# Altium PCB S905D_MIC_V1.1.PcbDoc
Units mil, origin at the board's own origin, x right, y up, seen from the top; angles counter-clockwise.
Board outline 2558.83 x 2558.83 mil, 2 copper layers (Top Layer, Bottom Layer); 83 components, 66 nets, 488 pads, 507 vias.
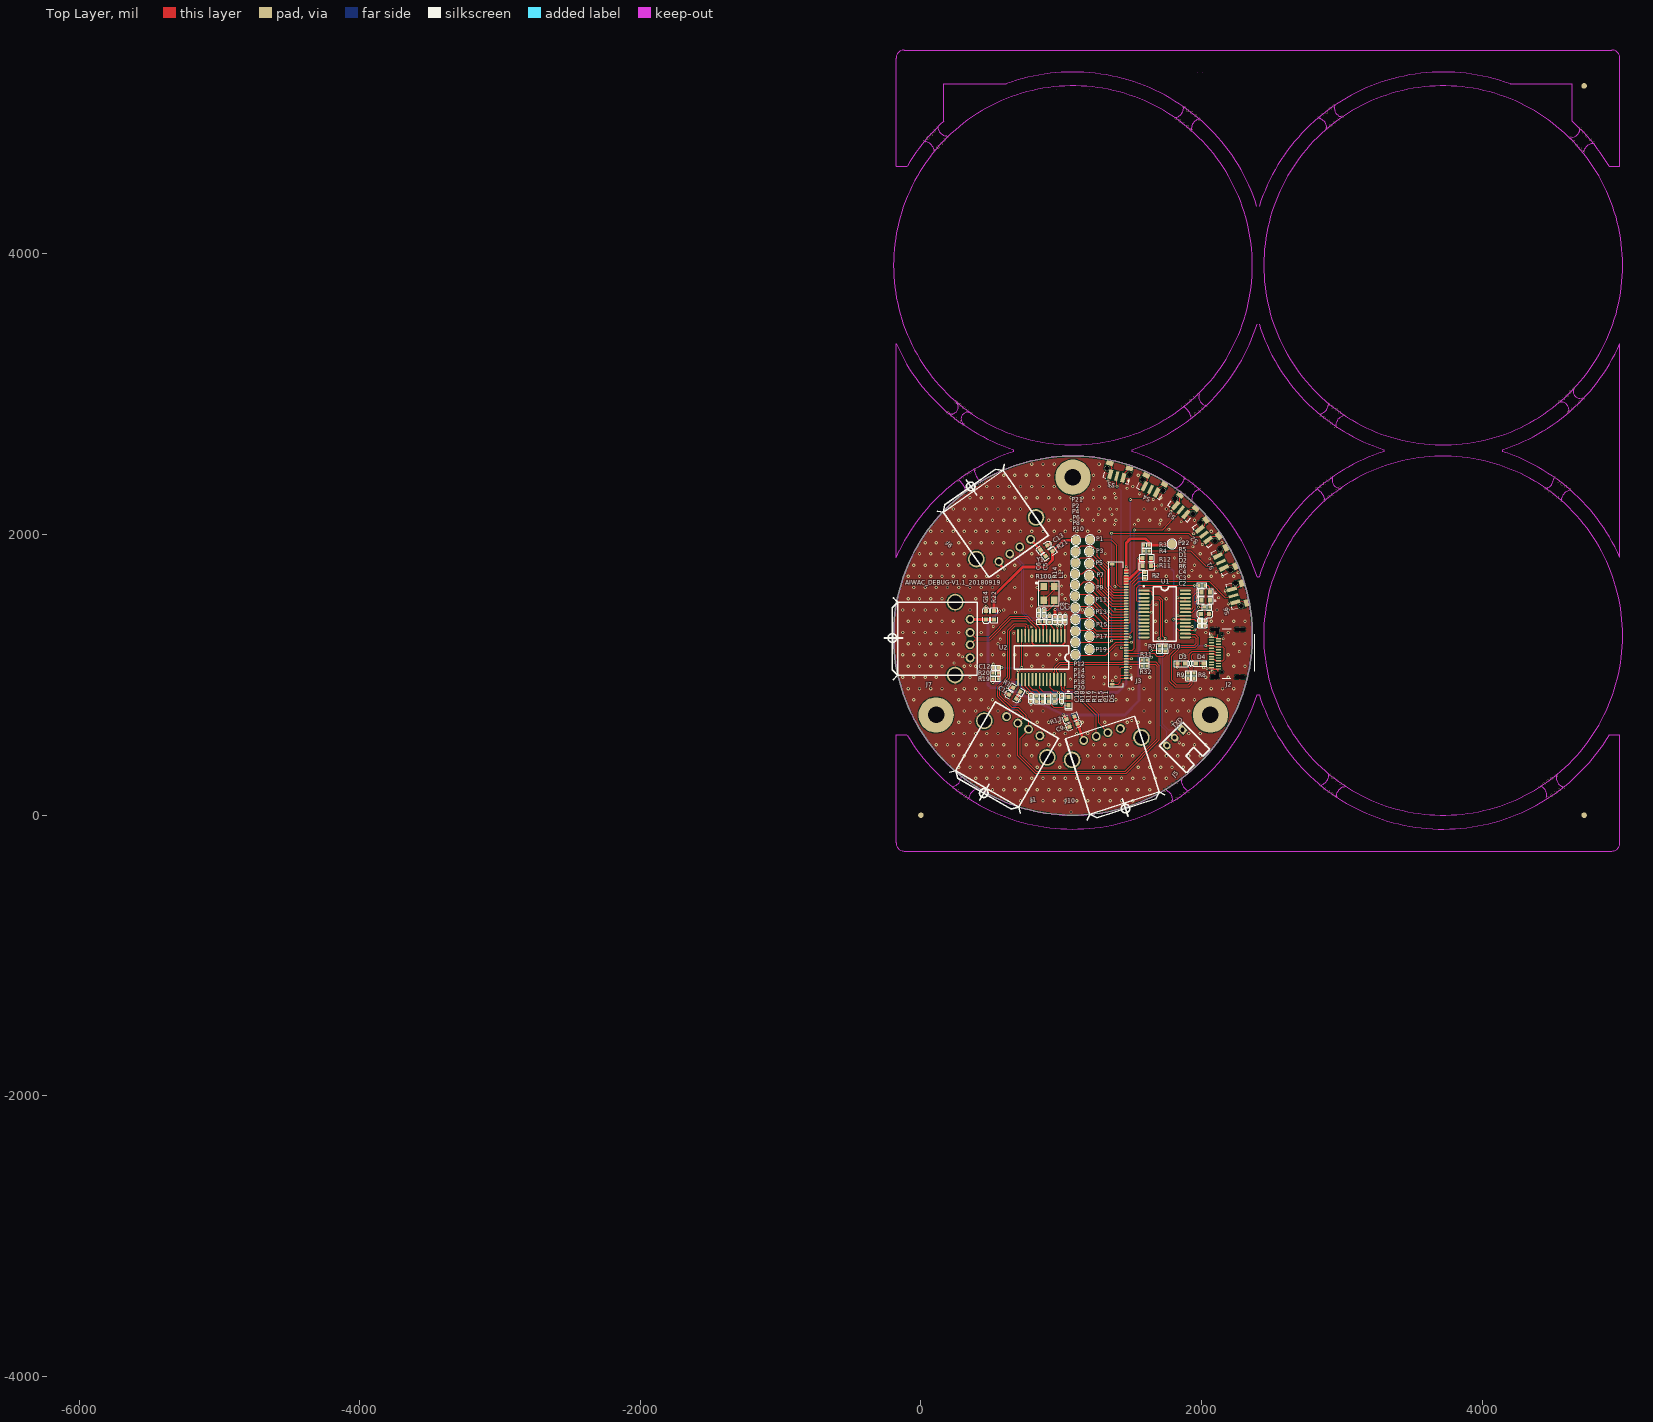
[diagram p0: Top Layer view]
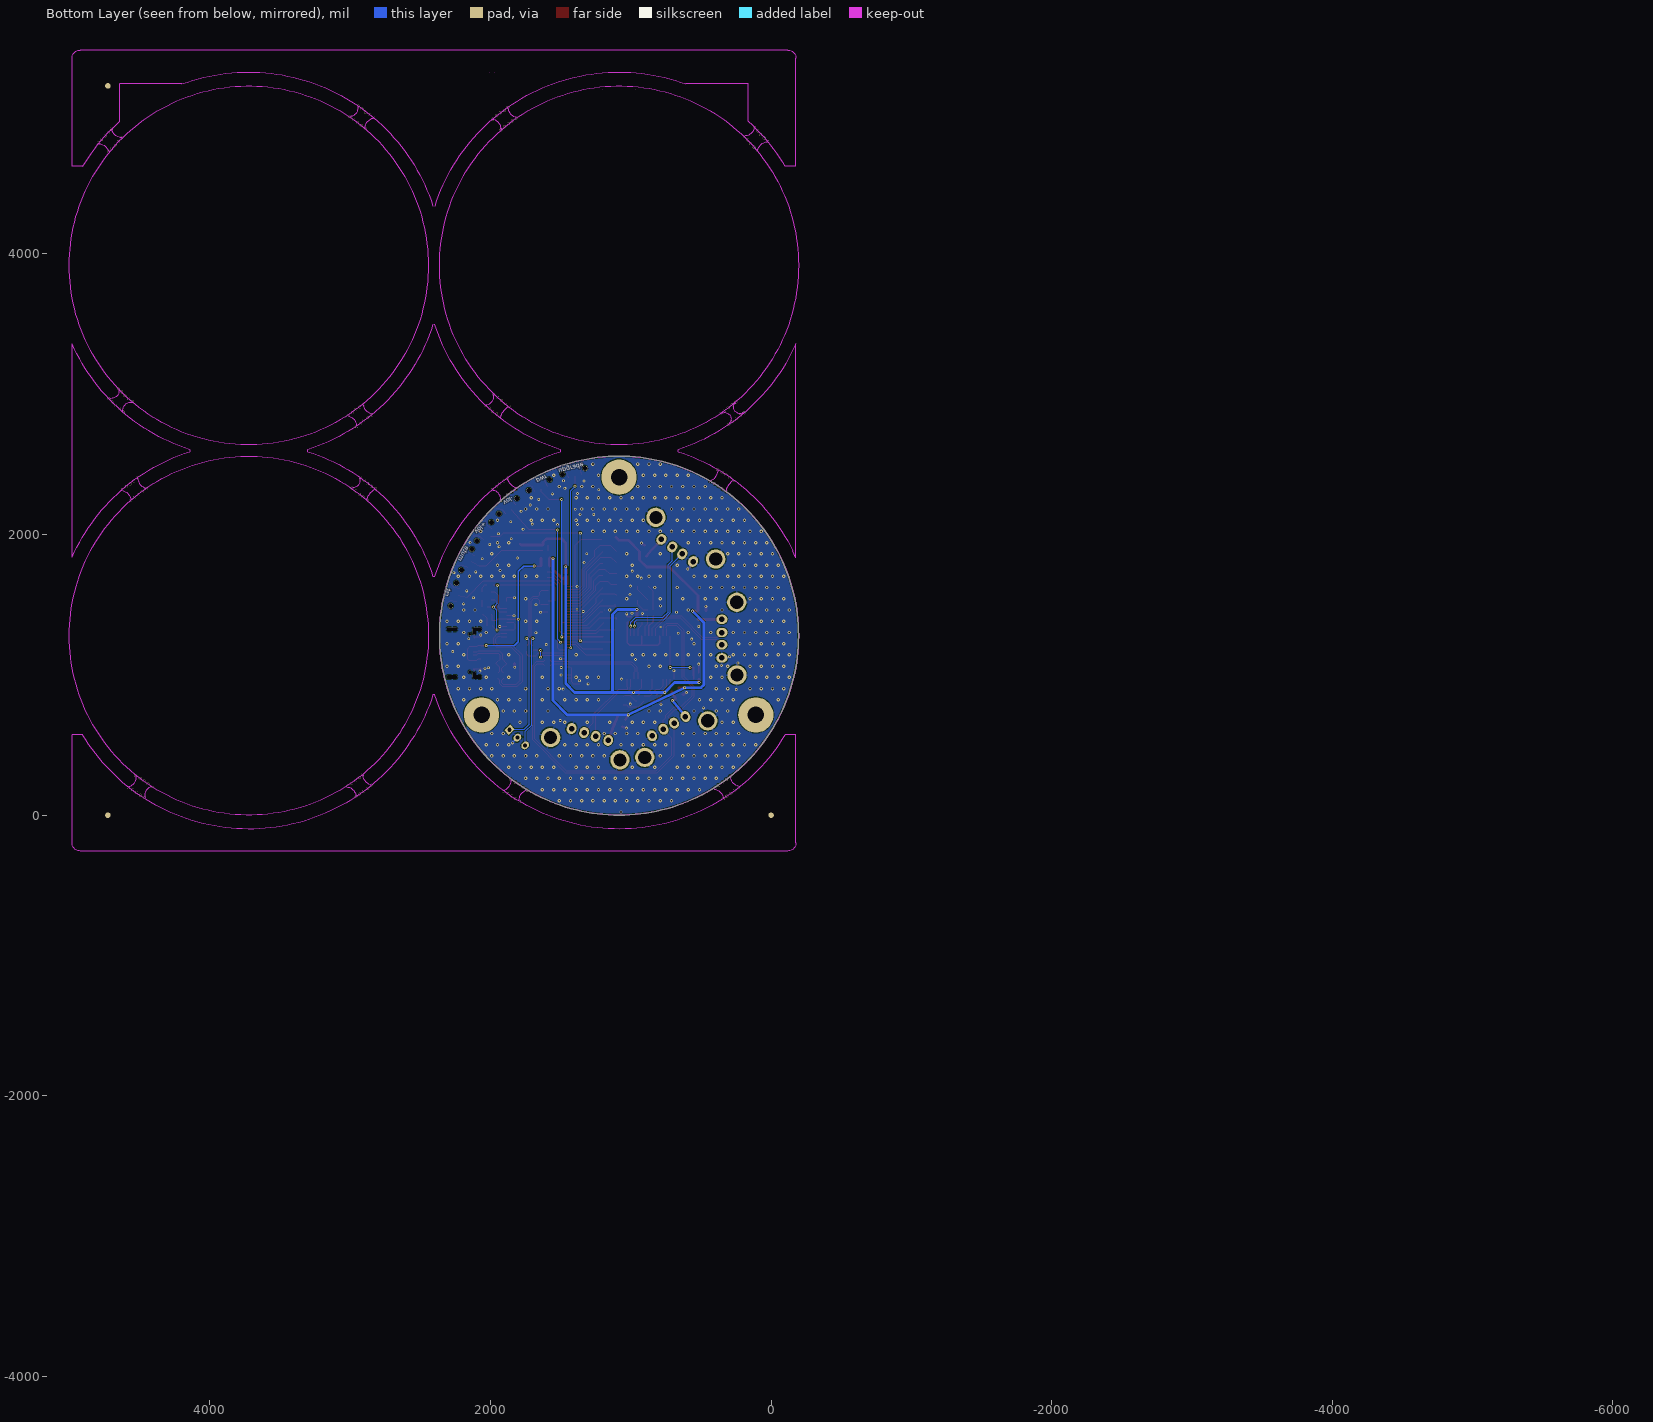
[diagram p1: Bottom Layer view, seen from below]

## Layer stack, top to bottom
Top Solder: solder mask 0.4, Solder Resist, Dk 3.5
Top Layer: signal copper 1.4
Dielectric 1: dielectric 12.6, FR-4, Dk 4.8
Bottom Layer: signal copper 1.4
Bottom Solder: solder mask 0.4, Solder Resist, Dk 3.5

## Board outline
-196.26,1279.66 ccw(c1083.16,1279.66) 1083.16,0.25 ccw(c1083.16,1279.66) 2362.57,1279.66 ccw(c1083.16,1279.66) 1083.16,2559.08 ccw(c1083.16,1279.66)

## Design rules (kind name [scope] priority, off if disabled: settings)
Clearance Clearance_1 [All] p1: gap=7
Clearance [All] p2: gap=7
DiffPairsRouting DiffPair_DiffPairsRouting_2 [InDifferentialPair ('NewDifferentialPair2')] p1: maxlimit=8 minlimit=8 mostfreqgap=8 toplayer_minwidth=8 toplayer_maxwidth=8 toplayer_prefwidth=8 bottomlayer_minwidth=8 bottomlayer_maxwidth=8 bottomlayer_prefwidth=8 maxuncoupledlength=500
DiffPairsRouting DiffPairsRouting_1 [All] p2: maxlimit=8 minlimit=8 mostfreqgap=8 toplayer_minwidth=8 toplayer_maxwidth=8 toplayer_prefwidth=8 bottomlayer_minwidth=8 bottomlayer_maxwidth=8 bottomlayer_prefwidth=8 maxuncoupledlength=500
DiffPairsRouting DiffPair_DiffPairsRouting_1 [InDifferentialPair ('NewDifferentialPair3')] p3: maxlimit=8 minlimit=8 mostfreqgap=8 toplayer_minwidth=8 toplayer_maxwidth=8 toplayer_prefwidth=8 bottomlayer_minwidth=8 bottomlayer_maxwidth=8 bottomlayer_prefwidth=8 maxuncoupledlength=500
DiffPairsRouting DiffPair_DiffPairsRouting [InDifferentialPair ('NewDifferentialPair4')] p4: maxlimit=8 minlimit=8 mostfreqgap=8 toplayer_minwidth=8 toplayer_maxwidth=8 toplayer_prefwidth=8 bottomlayer_minwidth=8 bottomlayer_maxwidth=8 bottomlayer_prefwidth=8 maxuncoupledlength=500
DiffPairsRouting [All] p5: maxlimit=10 minlimit=8 mostfreqgap=8 toplayer_minwidth=8 toplayer_maxwidth=8 toplayer_prefwidth=8 bottomlayer_minwidth=8 bottomlayer_maxwidth=8 bottomlayer_prefwidth=8 maxuncoupledlength=500
DiffPairsRouting DiffPair_DiffPairsRouting_3 [InDifferentialPair ('NewDifferentialPair1')] p6: maxlimit=8 minlimit=8 mostfreqgap=8 toplayer_minwidth=8 toplayer_maxwidth=8 toplayer_prefwidth=8 bottomlayer_minwidth=8 bottomlayer_maxwidth=8 bottomlayer_prefwidth=8 maxuncoupledlength=500
MatchedLengths DiffPair_MatchedLengths [InDifferentialPair ('NewDifferentialPair4')] p1: tolerance=1000 checknetsindiffpair=FALSE checkdiffpairvsdiffpair=TRUE checkxsignals=TRUE checkothers=TRUE
MatchedLengths DiffPair_MatchedLengths_1 [InDifferentialPair ('NewDifferentialPair3')] p2: tolerance=1000 checknetsindiffpair=FALSE checkdiffpairvsdiffpair=TRUE checkxsignals=TRUE checkothers=TRUE
MatchedLengths DiffPair_MatchedLengths_2 [InDifferentialPair ('NewDifferentialPair2')] p3: tolerance=1000 checknetsindiffpair=FALSE checkdiffpairvsdiffpair=TRUE checkxsignals=TRUE checkothers=TRUE
MatchedLengths DiffPair_MatchedLengths_3 [InDifferentialPair ('NewDifferentialPair1')] p4: tolerance=1000 checknetsindiffpair=FALSE checkdiffpairvsdiffpair=TRUE checkxsignals=TRUE checkothers=TRUE
PolygonConnect PolygonConnect_2 [isvia] p1: connectstyle=Direct reliefconductorwidth=10 reliefentries=4 polygonreliefangle="90 Angle" airgapwidth=10
PolygonConnect [All] p2: connectstyle=Relief reliefconductorwidth=10 reliefentries=4 polygonreliefangle="90 Angle" airgapwidth=10
RoutingVias [All] p1: holewidth=10 width=20 viastyle="Through Hole" minholewidth=10 minwidth=20 maxholewidth=10 maxwidth=20
SilkToSilkClearance [All] p1: silktosilkclearance=0
SilkToSolderMaskClearance [IsPad] p1: minsilkscreentomaskgap=0 clearancetoexposedcopper=TRUE
SolderMaskExpansion [All] p1: expansion=4
Width [All] p1: maxlimit=20 minlimit=8 preferedwidth=10 minimp=50.000000 maximp=50.000000 favimp=50.000000
27 further rules are at their usual default settings.

## Components (designator, comment, footprint, x,y, rotation, side; value= is the part's Value field where it differs from the comment)
C1 "106K50V" C0603 679,830 r150 top
C2 "101J10V" C0402 2004.48,1350 r0 top
C3 "101J10V" C0402 2004.48,1386 r0 top
C4 "106K50V" C0603 1993.5,1434 r0 top locked
C5 "22PF" C0402 878,1441 r270 top
C6 "22PF" C0402 840,1441 r270 top
C7 "0.1UF" C0402 1028,1394 r90 top
C8 "0.1UF" C0402 992,1395 r90 top
C9 "106K50V" C0603 1115.38,651.52 r200 top
C10 "0.1UF" C0402 784,832 r90 top
C11 "0.1UF" C0402 1004,832 r90 top
C12 "0.1UF" C0402 534,1053 r180 top
C13 "106K50V" C0603 852,1890 r35 top
C14 "106K50V" C0603 464,1394.5 r90 top
D1 "LED0603G" D-LED0603G 2059,1589 r180 top locked
D2 "LED0603G" D-LED0603G 2059,1532 r180 top locked
D3 "ESDA_TR1/0603" HS_0603D 1855.75,1080.25 r180 top
D4 "ESDA_TR1/0603" HS_0603D 1987.75,1081.25 r0 top
D5 "LED0603G" D-LED0603G 1052,843 r270 top
J1 "USB" USB-AD 448,157 r150 top locked
J2 "TYPEC-3KU024S" "MICRO -TYPE C" 2069.86,1046.93 r90 top locked
J3 "FH34SRJ-40S" FH34SRJ-40S 1413.79,1361.17 r90 top locked
J5 "CON3X1" "XH2.54-3P - 弯插" 1863.68,608.68 r225 top locked
J6 "USB" USB-AD 354.56,2343.34 r35 top locked
J7 "USB" USB-AD -204,1263 r90 top locked
J10 "USB" USB-AD 1458,47 r198 top locked
L1 "120R/0402" C0402 956,1395 r270 top
P1 "TEST" TP 1205,1964 r0 top
P2 "TEST" TP 1101,1879 r0 top
P3 "TEST" TP 1199,1879 r0 top
P4 "TEST" TP 1101,1799 r0 top
P5 "TEST" TP 1199,1793 r0 top
P6 "TEST" TP 1098,1720 r0 top
P7 "TEST" TP 1198,1708 r0 top
P8 "TEST" TP 1098,1642 r0 top
P9 "TEST" TP 1200,1621 r0 top
P10 "TEST" TP 1097,1563 r0 top
P11 "TEST" TP 1200,1534 r0 top
P12 "TEST" TP 1100,1478 r0 top
P13 "TEST" TP 1200,1447 r0 top
P14 "TEST" TP 1100,1395 r0 top
P15 "TEST" TP 1200,1360 r0 top
P16 "TEST" TP 1100,1311 r0 top
P17 "TEST" TP 1200,1275 r0 top
P18 "TEST" TP 1100,1232 r0 top
P19 "TEST" TP 1200,1182 r0 top
P20 "TEST" TP 1100,1144 r90 top
P21 "TEST" TP 1105,1960 r0 top
P22 "TEST" TP 1789,1933 r90 top
R1 "0R" R0603 708,879 r150 top
R2 "22R" R0402 1595,1711 r90 top
R3 "10K" R0402 1606,1925 r0 top
R4 "22R  NC" R0402 1606,1883 r180 top
R5 "330R" R0402 2003,1638 r180 top
R6 "330R" R0402 2040,1483 r180 top
R7 "22R" R0402 1699,1188 r90 top
R8 "2.2R" R0402 1947,994 r90 top
R9 "2.2R" R0402 1904,994 r90 top
R10 "22R" R0402 1741,1188 r90 top
R11 "0R  NC" R0603 1639,1776 r180 top
R12 "0R NC" R0603 1579,1834 r0 top
R13 "0R" R0603 1093.38,703.52 r200 top
R14 "680R" R0402 917,1395 r90 top
R15 "100K" R0402 952,830.02 r90 top
R16 "100K" R0402 866,830.02 r90 top
R17 "1K" R0402 908,830.02 r90 top
R18 "10K" R0402 824,830.02 r90 top
R19 "10K" R0402 532,971 r180 top
R20 "47K  NC" R0402 533,1013 r0 top
R21 "0R" R0603 888,1846 r35 top
R22 "0R" R0603 521,1395 r90 top
R31 "0R" R0402 1593,1106 r0 top
R32 "0R" R0402 1593,1064 r0 top
R100 "1M" R0402 859,1380 r0 top
S1 "KSMD4.5X3-6P" SKRTLAE010 2138.1,1804.97 r117 top
S2 "KSMD4.5X3-6P" SKRTLAE010 2017,2000 r128 top
S3 "KSMD4.5X3-6P" SKRTLAE010 1852,2176 r139 top
S4 "KSMD4.5X3-6P" SKRTLAE010 1636,2322 r153 top
S5 "KSMD4.5X3-6P" SKRTLAE010 1396,2417 r165 top
S6 "KSMD4.5X3-6P" SKRTLAE010 2228,1564 r104 top
U1 "FT232R_SOP28" SSOP28#1 1589,1600.72 r0 top locked
U2 "GL850G-HHG31" SSOP28#2 1024.85,1279 r270 top locked
Y1 "12MHz" Y-CPX-32GA-4P 875.2,1631 r270 top

## Footprints (in the part's own frame and the unit in brackets; to place one, negate y for a bottom-side part, rotate by r counter-clockwise, add the part's x,y. Pads: shape width x height; smd on the part's side, far side on the other; paste and mask are expansions set on the pad)
C0402 [mil]
  rect 20x22 smd: 1(-19,0) 2(19,0)
  silkscreen extent -36,-15 36,15
C0603 [mil]
  rect 30x30 smd: 1(0,0) 2(60,0)
  silkscreen extent -25,-25 85,25, body extent -1,-15 61,16, height 12
D-LED0603G [mil]
  rect 30x30 smd: 1(0,0) 2(60,0)
  silkscreen extent -25,-25 90,25, body extent -2,-16 62,15, height 24
FH34SRJ-40S [mm]
  rect 0.3x0.8 smd: 1(-9.75,-1.25) 2(-9.25,-1.25) 3(-8.75,-1.25) 4(-8.25,-1.25) 5(-7.75,-1.25) 6(-7.25,-1.25) 7(-6.75,-1.25) 8(-6.25,-1.25) 9(-5.75,-1.25) 10(-5.25,-1.25) 11(-4.75,-1.25) 12(-4.25,-1.25) 13(-3.75,-1.25) 14(-3.25,-1.25) 15(-2.75,-1.25) 16(-2.25,-1.25) 17(-1.75,-1.25) 18(-1.25,-1.25) 19(-0.75,-1.25) 20(-0.25,-1.25) 21(0.25,-1.25) 22(0.75,-1.25) 23(1.25,-1.25) 24(1.75,-1.25) 25(2.25,-1.25) 26(2.75,-1.25) 27(3.25,-1.25) 28(3.75,-1.25) 29(4.25,-1.25) 30(4.75,-1.25) 31(5.25,-1.25) 32(5.75,-1.25) 33(6.25,-1.25) 34(6.75,-1.25) 35(7.25,-1.25) 36(7.75,-1.25) 37(8.25,-1.25) 38(8.75,-1.25) 39(9.25,-1.25) 40(9.75,-1.25)
  rect 0.4x0.8 smd: 41(10.85,1.25) 42(-10.85,1.25)
  silkscreen extent -11.3,-2.34 11.33,1.95
HS_0603D [mil]
  rect 30x30 smd: 1(-27.5,0) 2(27.5,0)
  silkscreen extent -70,-21 49,23
"MICRO -TYPE C" [mm]
  oval 0.6x1.6 hole 0.6 slot 1.6 at 90 deg: 25(-1.57,-0.625) 27(7.07,-0.625)
  oval 1.2x0.6 hole 0.6 slot 1.2 at 0 deg: 26(-1.245,-1.143) 28(6.756,-1.143)
  oval 0.6x1.9 hole 0.6 slot 1.9 at 90 deg: 29(-1.57,-5.175) 30(7.07,-5.175)
  round 0.5 hole 0.5: 31(-0.65,-1.975) 32(6.15,-1.975)
  rect 0.24x0.95 smd: A1(0.12,0) A2(0.62,0) A3(1.12,0) A4(1.62,0) A5(2.12,0) A6(2.62,0) A7(3.12,0) A8(3.62,0) A9(4.12,0) A10(4.62,0) A11(5.12,0) A12(5.62,0) B1(-0.13,-1.3) B2(0.37,-1.3) B3(0.87,-1.3) B4(1.37,-1.3) B5(1.87,-1.3) B6(2.37,-1.3) B7(2.87,-1.3) B8(3.37,-1.3) B9(3.87,-1.3) B10(4.37,-1.3) B11(4.87,-1.3) B12(5.37,-1.3)
  silkscreen extent -1.8,-7.87 7.16,0.28
R0402 [mil]
  rect 20x22 smd: 1(-19,0) 2(19,0)
  silkscreen extent -34,-18 34,18
R0603 [mil]
  rect 30x30 smd: 1(0,0) 2(60,0)
  silkscreen extent -25,-25 85,25, body extent 0,-16 62,15, height 18
SKRTLAE010 [mm]
  rect 0.75x1.8 smd: 1(-1.225,0) 3(1.225,0)
  rect 0.6x1.8 smd: 2(0,0)
  rect 1.3x0.9 smd: 4(-1.85,-1.95) 5(1.85,-1.95)
  round 0.9 hole 0.9: 6(-2.125,-0.9) 6(2.125,-0.9)
  silkscreen extent -2.34,-0.11 2.34,0.89
SSOP28#1 [mm]
  rect 2x0.35 smd: 1(0,0)
  oval 2x0.35 smd: 2(0,-0.65) 3(0,-1.3) 4(0,-1.95) 5(0,-2.6) 6(0,-3.25) 7(0,-3.9) 8(0,-4.55) 9(0,-5.2) 10(0,-5.85) 11(0,-6.5) 12(0,-7.15) 13(0,-7.8) 14(0,-8.45) 15(7.5,-8.45) 16(7.5,-7.8) 17(7.5,-7.15) 18(7.5,-6.5) 19(7.5,-5.85) 20(7.5,-5.2) 21(7.5,-4.55) 22(7.5,-3.9) 23(7.5,-3.25) 24(7.5,-2.6) 25(7.5,-1.95) 26(7.5,-1.3) 27(7.5,-0.65) 28(7.5,0)
  silkscreen extent -0.13,-9.18 5.89,0.87
SSOP28#2 [mm]
  rect 2.388x0.305 smd: 1(0,0)
  oval 2.388x0.305 smd: 2(0,-0.65) 3(0,-1.3) 4(0,-1.951) 5(0,-2.601) 6(0,-3.251) 7(0,-3.901) 8(0,-4.552) 9(0,-5.202) 10(0,-5.852) 11(0,-6.502) 12(0,-7.153) 13(0,-7.803) 14(0,-8.453) 15(7.899,-8.453) 16(7.899,-7.803) 17(7.899,-7.153) 18(7.899,-6.502) 19(7.899,-5.852) 20(7.899,-5.202) 21(7.899,-4.552) 22(7.899,-3.901) 23(7.899,-3.251) 24(7.899,-2.601) 25(7.899,-1.951) 26(7.899,-1.3) 27(7.899,-0.65) 28(7.899,0)
  silkscreen extent 1.83,-9.15 6.07,0.7
TP [mm]
  round 1.6 smd: 1(0,0)
  silkscreen extent -0.89,-0.9 0.9,0.9
USB-AD [mm]
  round 1.6 / inner oval 1.7x2 / far side oval 1.7x2 hole 1: 1(3.378,-14.072) 2(0.991,-14.072) 3(-1.219,-14.072) 4(-3.607,-14.072)
  round 3 / inner round 3.5 / far side round 3.5 hole 2.4: 5(-6.706,-11.354) 6(6.477,-11.379)
  silkscreen extent -7.5,-15.36 7.25,1.45
"XH2.54-3P - 弯插" [mm]
  rect 1.2x1.5 hole 0.75: 1(0,0)
  oval 1.2x1.5 hole 0.75: 2(2,0) 3(4,0)
  silkscreen extent -1,-0.91 5,6, body extent -0.41,-0.41 0.39,0.39, height 6
Y-CPX-32GA-4P [mm]
  rect 1.3x1.1 smd: 1(0,0) 2(2.5,0) 3(2.5,1.9) 4(0,1.9)
  silkscreen extent -1,-1.44 3.5,2.8

## Part data
C1 C4 C9 C13 C14: library part C0603X7R-106K50V, "贴片电容-陶瓷"
C2 C3 C5 C6 C7 C8 C10 C11 C12: library part C0402X7R-101J10V, "贴片电容-陶瓷"
D1 D2 D5: library part DLED-0603-G, "贴片二极管-LED"
D3 D4: library part "D Zener", "Zener Diode"
J2: "DIP Switch"
J3: library part SFH34SRJ-40S, "贴片FPC40PIN插座"
L1: library part 3.3uH, "贴片电感-屏蔽"
P1 P2 P3 P4 P5 P6 P7 P8 P9 P10 P11 P12 P13 P14 P15 P16 P17 P18 P19 P20 P21 P22: "BNC Elbow Connector"
R1 R11 R12 R13 R21 R22: library part R0603-0R, "贴片电阻-通用"
R2 R3 R4 R5 R6 R7 R8 R9 R10 R14 R15 R16 R17 R18 R19 R20 R31 R32 R100: library part R0402-1KF, "贴片电阻-通用"
S1 S2 S3 S4 S5 S6: "贴片侧按键"
U1: "USB 转串口芯片"
Y1: library part YC-26MHz, "晶振-贴片无源"

## Free pads (board coordinates)
  round 110.51 on Keep-Out: 1(0,-177)
  round 110.5 on Keep-Out: 1(0,5375.1) 1(4726.09,-177) 1(4726.09,5375.1)
  round 251.97 hole 118.11: 2(108.15,714.66) 2(1083.13,2409.64) 4(2063.13,714.64)
  round 19.68 hole 19.68 unplated: 5(24.52,4801.5) 5(49.79,4826.39) 5(72.89,4849.46) 5(94.35,4876.7) 5(96,4735.01) 5(116.62,4901.85) 5(121.44,4761.9) 5(144.54,4784.97) 5(166,4812.21) 5(188.27,4837.36) 5(192.47,2867.47) 5(219.47,2847.47) 5(231.47,199.47) 5(248.47,2828.48) 5(250.47,2944.47) 5(260.47,176.47) 5(264.7,2386.96) 5(273.47,2807.48) 5(277.47,2924.47) 5(285.47,155.47) 5(291.47,276.47) 5(292.73,2405.49) 5(300.47,2784.47) 5(306.47,2905.48) 5(314.47,136.48) 5(317.22,2306.12) 5(318.47,253.47) 5(320.5,2426.24) 5(331.47,2884.48) 5(341.47,116.47) 5(343.47,232.47) 5(345.25,2324.65) 5(348.79,2442.55) 5(360.47,2861.48) 5(372.47,213.48) 5(373.02,2345.4) 5(380.32,2461.94) 5(399.47,193.47) 5(401.31,2361.71) 5(432.15,2379.22) 5(1739.7,178.96) 5(1767.73,197.49) 5(1792.22,98.12) 5(1795.5,218.24) 5(1816.47,4967.47) 5(1819.47,2325.47) 5(1820.25,116.65) 5(1823.79,234.55) 5(1843.47,4947.47) 5(1846.47,2305.47) 5(1848.02,137.4) 5(1855.32,253.94) 5(1867.29,2915.5) 5(1872.47,4928.47) 5(1874.47,5044.47) 5(1875.47,2286.47) 5(1876.31,153.71) 5(1877.47,2402.47) 5(1896.49,2935.63) 5(1897.47,4907.47) 5(1900.47,2265.47) 5(1901.47,5024.47) 5(1904.47,2382.47) 5(1907.15,171.22) 5(1923.25,2954.34) 5(1924.47,4884.47) 5(1926.14,2837.62) 5(1927.47,2242.47) 5(1930.47,5005.47) 5(1933.47,2363.47) 5(1949.11,2977.44) 5(1955.47,4984.47) 5(1955.86,2859.68) 5(1958.47,2342.47) 5(1975.41,2998.34) 5(1982.61,2878.39) 5(1984.47,4961.47) 5(1987.47,2319.47) 5(2008.47,2901.49) 5(2034.78,2922.39) 5(2819.37,2325.22) 5(2833.37,4972.22) 5(2846.47,2852.47) 5(2848.58,2345.35) 5(2849.47,214.47) 5(2862.58,4992.35) 5(2873.47,2832.47) 5(2875.33,2364.06) 5(2878.22,2247.34) 5(2878.47,191.47) 5(2889.33,5011.06) 5(2892.22,4894.34) 5(2901.19,2387.16) 5(2902.47,2813.48) 5(2903.47,170.47) 5(2904.47,2929.47) 5(2907.94,2269.4) 5(2909.47,291.48) 5(2915.19,5034.16) 5(2921.94,4916.4) 5(2927.47,2792.48) 5(2927.5,2408.06) 5(2931.47,2909.47) 5(2932.47,151.48) 5(2934.7,2288.11) 5(2936.47,268.47) 5(2941.5,5055.06) 5(2948.7,4935.11) 5(2954.47,2769.47) 5(2958.03,133.42) 5(2960.47,2890.48) 5(2960.56,2311.2) 5(2961.47,247.47) 5(2974.56,4958.2) 5(2985.47,2869.48) 5(2986.86,2332.11) 5(2990.47,228.48) 5(3000.86,4979.11) 5(3014.47,2846.48) 5(3017.47,208.47) 5(4412.7,205.96) 5(4440.73,224.49) 5(4454.47,2327.47) 5(4465.22,125.12) 5(4468.5,245.24) 5(4483.47,2304.47) 5(4493.25,143.65) 5(4496.79,261.55) 5(4508.47,2283.47) 5(4514.47,2404.47) 5(4521.02,164.4) 5(4528.32,280.94) 5(4537.47,2264.48) 5(4541.47,2381.47) 5(4549.31,180.72) 5(4552.33,2947.02) 5(4564.47,2244.47) 5(4566.47,2360.47) 5(4579.67,2969.61) 5(4580.15,198.22) 5(4595.47,2341.48) 5(4604.69,2990.59) 5(4617.75,2874.56) 5(4622.47,2321.47) 5(4628.44,3015.85) 5(4628.55,4828.2) 5(4645.43,2899.12) 5(4652.83,3038.96) 5(4653.12,4800.52) 5(4670.45,2920.1) 5(4674.09,4775.49) 5(4694.2,2945.36) 5(4699.35,4751.75) 5(4701.01,4893.61) 5(4718.59,2968.47) 5(4722.47,4727.36) 5(4723.61,4866.27) 5(4744.58,4841.25) 5(4769.84,4817.5) 5(4792.96,4793.12)
  round 39.37 smd: 6(0,0) 6(4726.09,0) 6(4726.09,5198.1)
  round 39.37 smd far side: 6(0,0) 6(4726.09,0) 6(4726.09,5198.1)

## Via types
v1: diameter 24, hole 12, Top Layer to Bottom Layer, tented both sides, 389 vias
v2: diameter 20, hole 10, Top Layer to Bottom Layer, tented both sides, 116 vias
v3: diameter 16, hole 8, Top Layer to Bottom Layer, tented both sides, 2 vias

## Nets (pads, with @x,y where several pads share a name; then routed paths per layer and width w, separated by ;. In a path a pad name is that pad's centre, name@x,y a point inside that pad or via, vN(x,y) a via of type N, cw(c..) or ccw(c..) an arc to the next point about the centre after c; other vN are vias at no path point)
3V3: C10.2 C11.2 D5.1 J3.39 J3.40 L1.1 P22.1 R3.2 R15.1 R16.1 R18.1 R19.2 U2.16 U2.24 | length 3778.2
  Top Layer w8: U2.16 717.65,917.35 C10.2 R18.1 R16.1 ; U2.24 922.45,909.55 946,886 969,886 v2(980,875) C11.2 ; R15.1 964.02,811.02 C11.2 ; D5.1 1044,851 C11.2 ; J3.39 J3.39@1463,1728.57
  Top Layer w20: v2(513,946) R19.2 ; L1.1 v2(956,1466) ; J3.39@1463,1728.57 J3.40 v2(1463,1771) 1463,1941 1492,1970 1601,1970 1625,1946 R3.2 1781,1925 P22.1
  Bottom Layer w20: v2(513,946) 687,946 757,876 v2(757,875) v2(980,875) 1124,875 ; v2(956,1466) 1095,1466 1130,1431 1130,881 1124,875 ; v2(1463,1771) 1463,938 1400,875 1124,875
5V: J3.35 J3.36 J3.37 J3.38 P21.1 R1.2 R11.2 R12.1 R13.2 R21.2 R22.2 | length 4103.3
  Top Layer w8: J3.35 J3.36 J3.37 J3.38
  Top Layer w20: v2(560,1455) R22.2 521,1565 725,1769 886,1769 937.15,1820.15 R21.2 1016.73,1960 1084,1960 P21.1@1105.47,1981.47 ; v2(616,909) R1.2 ; v2(1018,715) R13.2 ; J3.37 1487.98,1685.98 1554,1752 v2(1554,1830) 1575,1830 R12.1 R11.2
  Bottom Layer w20: v2(560,1455) 477,1372 477,930 498,909 v2(616,909) v2(1018,715) 1452,715 1554,817 v2(1554,1830)
CBUS0: D1.2 U1.23 | length 210.3
  Top Layer w8: U1.23 1931.77,1472.77 1941,1482 1941,1563 1967,1589 D1.2
CBUS1: D2.2 U1.22 | length 179.1
  Top Layer w8: U1.22 1933.18,1447.18 1956,1470 1956,1520 1968,1532 D2.2
DM1: J10.2 U2.27 | length 546.6
  Top Layer w8: U2.27 999.25,917 1004.05,912.2 1004.05,894.37 1019.42,879 1082,879 1249.71,711.29 J10.2
DM2: J6.2 U2.2 | length 869.1
  Top Layer w8: U2.2 999.25,1330 1000.45,1331.2 v2(1000.45,1348)
  Bottom Layer w8: J6.2 705.81,1910.35 705.81,1811.81 733,1784.63 733,1448 775,1406 968,1406 1000.45,1373.55 v2(1000.45,1348)
DM3: J7.2 U2.8 | length 661.1
  Top Layer w8: J7.2 385.5,1266.5 486,1266.5 637.5,1418 758.63,1418 845.65,1330.98 U2.8
DM4: J1.2 R31.2 U2.11 | length 3083.8
  Top Layer w8: U2.11 768.85,1330 764.05,1334.8 764.05,1349.95 748,1366 665.79,1366 618,1318.21 618,987 548,917 548,844.79 640.79,752 687.37,752 732.97,706.4 732.97,698.03 J1.2 691.23,422.15 814.37,299 1462,299 1700,537 1700,668 1700,1066.21 1673.21,1093 1625,1093 R31.2
DP1: J10.3 U2.28 | length 547.3
  Top Layer w8: U2.28 1024.85,917 1020.05,912.2 1020.05,901 1026.05,895 1088.63,895 1265.71,717.91 1265.71,658 1332.46,591.26 J10.3
DP2: J6.3 U2.3 | length 836.3
  Top Layer w8: v2(972.45,1348) 972.45,1331.2 973.65,1330 U2.3
  Bottom Layer w8: J6.3 717,1778 717,1442.79 769.79,1390 961.37,1390 972.45,1378.92 v2(972.45,1348)
DP3: J7.3 U2.9 | length 630.6
  Top Layer w8: J7.3 385.5,1250.5 492.63,1250.5 644.13,1402 752,1402 820.05,1333.95 U2.9
DP4: J1.3 R32.2 U2.12 | length 2970.5
  Top Layer w8: U2.12 743.25,1330 748.05,1334.8 748.05,1343.32 741.37,1350 671,1350 633,1312 633,980.79 563,910.79 563,851 646,768 694,768 751,711 751,694 768.29,676.71 768.29,614.5 J1.3 766.57,607.57 707.23,548.23 707.23,428.77 821,315 1455.37,315 1684,543.63 1684,1061 1668,1077 1625,1077 R32.2
DSP_RST: J3.20 P13.1 | length 305.6
  Top Layer w8: P13.1@1186,1461 P13.1@1189,1461 ; P13.1 1218.33,1447 1314,1351.33 J3.20
DSP_SCL_B: J3.18 P15.1 | length 289.5
  Top Layer w8: P15.1@1190,1368 P15.1@1196,1368 ; P15.1 1204,1360 1251,1313 1463,1313 J3.18
DSP_SDA_B: J3.19 P14.1 | length 399.8
  Top Layer w8: P14.1 1100,1402.5 1225.5,1402.5 1296.35,1331.65 J3.19
GND: C1.2 C2.2 C3.2 C4.2 C7.2 C8.2 C9.2 C10.1 C11.1 C12.2 C13.2 C14.2 D3.2 D4.2 J1.4 J1.5 J1.6 J2.25 J2.26 J2.27 J2.28 J2.29 J2.30 J2.A1 J2.A12 J2.B1 J2.B12 J3.1 J3.2 J3.5 J3.8 J3.24 J3.26 J3.41 J3.42 J5.2 J6.4 J6.5 J6.6 J7.4 J7.5 J7.6 J10.4 J10.5 J10.6 R14.2 R20.1 S1.1 S1.3 S1.4 S1.5 S2.1 S2.3 S2.4 S2.5 S3.1 S3.3 S3.4 S3.5 S4.1 S4.3 S4.4 S4.5 S5.1 S5.3 S5.4 S5.5 S6.1 S6.3 S6.4 S6.5 U1.7 U1.18 U1.21 U1.25 U1.26 U2.15 Y1.2 Y1.4 | length 2778.5
  Top Layer w8: v2(692,1029) U2.15 ; v2(784,790) C10.1 ; Y1.2 950,1607.38 Y1.4 ; v2(1004,792) C11.1 ; v2(1029,1435) v2@1031,1437 ; v2(1338,1451.7) 1338,1451 1358.93,1430.07 J3.24 ; S5.5 1360,2470 S5.3 ; J3.42 1405.01,934.01 1422,951 1422,975 ; v3(1383,1468) 1461.56,1468 J3.26 ; S5.1 1455,2446 S5.4 ; J3.1 1424.32,977.31 1422,975 ; J3.2 1423,997 1422,998 ; J3.5 1430.06,1056.06 1422,1048 1422,998 ; U1.7 1641.82,1447.18 v2(1642,1447) ; S4.3 1612,2383 S4.5 ; S4.1 1699,2339 S4.4 ; S3.3 1845,2240 S3.5 ; v2(1829,1550) 1829.46,1549.54 U1.26 U1.25 ; v2(1832,1422) 1832.41,1421.59 U1.21 ; U1.18 v2(1933.82,1344.82) v2@1933.64,1345 ; S3.1 1917,2176 S3.4 ; S2.3 2023,2068 S2.5 ; C2.2 C3.2 2023.48,1403.98 C4.2 ; S2.1 2081,1989 S2.4 ; v2(2069.47,1284) 2069.77,1273.19 J2.A12@2069.86,1268.47 ; J2.A1 2070.34,1051.66 2080.19,1041.81 J2.B1 ; J2.A12 2106.47,1268.19 2114.86,1259.8 J2.28 ; S1.3 2155,1871 S1.5 ; S1.1 2199,1782 S1.4 ; S6.3 2263,1624 S6.5 ; S6.1 2283,1530 S6.4 ; 1422,975 1422,998
  Top Layer w10: R20.1 C12.2 v2(515,1077) ; R14.2 v2(917,1438) ; C8.2 1027,1414 C7.2 1029,1414 v2(1029,1435) ; J3.8 v2@1500,1115.11 ; J2.26 2114.86,1035.63 J2.B1
  Top Layer w20: C14.2 v2(464,1488) ; J6.4 556,1792 v2(593,1755) ; v2(603,874) C1.2 ; C13.2 v2(923,1939) ; J1.5@922.13,453.11 J1.5@935.48,439.77 ; v2(1031,621) C9.2 ; v2(1827.25,1054.25) D3.2
  Bottom Layer w8: J5.2@1809,551 1845,515 v2(1842,515)
  other v1: 1069.47,22.47 709.47,102.47 789.47,102.47 869.47,102.47 949.47,102.47 1029.47,102.47 1109.47,102.47 1189.47,102.47 1269.47,102.47 1349.47,102.47 1429.47,102.47 1509.47,102.47 509.47,182.47 589.47,182.47 669.47,182.47 749.47,182.47 829.47,182.47 909.47,182.47 989.47,182.47 1069.47,182.47 1149.47,182.47 1229.47,182.47 1309.47,182.47 1389.47,182.47 1469.47,182.47 1549.47,182.47 1629.47,182.47 389.47,262.47 469.47,262.47 549.47,262.47 629.47,262.47 709.47,262.47 789.47,262.47 869.47,262.47 949.47,262.47 1029.47,262.47 1109.47,262.47 1189.47,262.47 1269.47,262.47 1349.47,262.47 1429.47,262.47 1509.47,262.47 1589.47,262.47 1669.47,262.47 1749.47,262.47 269.47,342.47 349.47,342.47 429.47,342.47 509.47,342.47 589.47,342.47 669.47,342.47 829.47,342.47 989.47,342.47 1229.47,342.47 1309.47,342.47 1389.47,342.47 1549.47,342.47 1629.47,342.47 1709.47,342.47 1789.47,342.47 1869.47,342.47 229.47,422.47 309.47,422.47 389.47,422.47 469.47,422.47 549.47,422.47 629.47,422.47 789.47,422.47 1189.47,422.47 1269.47,422.47 1349.47,422.47 1429.47,422.47 1509.47,422.47 1669.47,422.47 1749.47,422.47 1829.47,422.47 1909.47,422.47 1989.47,422.47 109.47,502.47 189.47,502.47 269.47,502.47 349.47,502.47 429.47,502.47 509.47,502.47 589.47,502.47 749.47,502.47 829.47,502.47 909.47,502.47 989.47,502.47 1069.47,502.47 1229.47,502.47 1309.47,502.47 1389.47,502.47 1469.47,502.47 1869.47,502.47 1949.47,502.47 2029.47,502.47 229.47,582.47 309.47,582.47 389.47,582.47 469.47,582.47 549.47,582.47 629.47,582.47 949.47,582.47 1029.47,582.47 1109.47,582.47 1189.47,582.47 1909.47,582.47 1989.47,582.47 269.47,662.47 349.47,662.47 829.47,662.47 909.47,662.47 989.47,662.47 1149.47,662.47 1309.47,662.47 1469.47,662.47 1549.47,662.47 1629.47,662.47 1789.47,662.47 309.47,742.47 389.47,742.47 549.47,742.47 789.47,742.47 869.47,742.47 1589.47,742.47 1749.47,742.47 1829.47,742.47 1909.47,742.47 -50.53,822.47 269.47,822.47 349.47,822.47 429.47,822.47 509.47,822.47 1229.47,822.47 1309.47,822.47 1389.47,822.47 1469.47,822.47 1629.47,822.47 1789.47,822.47 1869.47,822.47 1949.47,822.47 2189.47,822.47 -90.53,902.47 -10.53,902.47 69.47,902.47 149.47,902.47 309.47,902.47 389.47,902.47 1509.47,902.47 1589.47,902.47 1749.47,902.47 1989.47,902.47 2069.47,902.47 2149.47,902.47 2229.47,902.47 -130.53,982.47 -50.53,982.47 29.47,982.47 109.47,982.47 349.47,982.47 429.47,982.47 1229.47,982.47 1309.47,982.47 1389.47,982.47 1629.47,982.47 1869.47,982.47 2029.47,982.47 2189.47,982.47 -90.53,1062.47 -10.53,1062.47 69.47,1062.47 149.47,1062.47 309.47,1062.47 389.47,1062.47 789.47,1062.47 869.47,1062.47 2229.47,1062.47 2309.47,1062.47 -130.53,1142.47 -50.53,1142.47 29.47,1142.47 109.47,1142.47 189.47,1142.47 269.47,1142.47 429.47,1142.47 509.47,1142.47 589.47,1142.47 669.47,1142.47 749.47,1142.47 829.47,1142.47 909.47,1142.47 989.47,1142.47 1389.47,1142.47 1869.47,1142.47 2189.47,1142.47 -90.53,1222.47 -10.53,1222.47 69.47,1222.47 149.47,1222.47 229.47,1222.47 549.47,1222.47 2229.47,1222.47 2309.47,1222.47 -130.53,1302.47 -50.53,1302.47 29.47,1302.47 109.47,1302.47 189.47,1302.47 269.47,1302.47 429.47,1302.47 589.47,1302.47 2029.47,1302.47 2189.47,1302.47 -90.53,1382.47 -10.53,1382.47 69.47,1382.47 149.47,1382.47 229.47,1382.47 1669.47,1382.47 1749.47,1382.47 2069.47,1382.47 2149.47,1382.47 2229.47,1382.47 2309.47,1382.47 -130.53,1462.47 -50.53,1462.47 29.47,1462.47 109.47,1462.47 349.47,1462.47 589.47,1462.47 1149.47,1462.47 2109.47,1462.47 2189.47,1462.47 -90.53,1542.47 -10.53,1542.47 69.47,1542.47 149.47,1542.47 389.47,1542.47 469.47,1542.47 629.47,1542.47 789.47,1542.47 1029.47,1542.47 1749.47,1542.47 -50.53,1622.47 29.47,1622.47 109.47,1622.47 189.47,1622.47 269.47,1622.47 349.47,1622.47 429.47,1622.47 509.47,1622.47 669.47,1622.47 829.47,1622.47 -90.53,1702.47 -10.53,1702.47 69.47,1702.47 149.47,1702.47 229.47,1702.47 309.47,1702.47 389.47,1702.47 469.47,1702.47 549.47,1702.47 789.47,1702.47 869.47,1702.47 949.47,1702.47 1029.47,1702.47 1669.47,1702.47 1749.47,1702.47 1829.47,1702.47 1909.47,1702.47 1989.47,1702.47 2069.47,1702.47 2149.47,1702.47 2229.47,1702.47 -50.53,1782.47 29.47,1782.47 109.47,1782.47 189.47,1782.47 269.47,1782.47 669.47,1782.47 989.47,1782.47 1869.47,1782.47 1949.47,1782.47 -10.53,1862.47 69.47,1862.47 149.47,1862.47 229.47,1862.47 309.47,1862.47 789.47,1862.47 1029.47,1862.47 1989.47,1862.47 29.47,1942.47 109.47,1942.47 189.47,1942.47 269.47,1942.47 349.47,1942.47 429.47,1942.47 509.47,1942.47 589.47,1942.47 1869.47,1942.47 1949.47,1942.47 69.47,2022.47 149.47,2022.47 229.47,2022.47 309.47,2022.47 389.47,2022.47 469.47,2022.47 549.47,2022.47 629.47,2022.47 709.47,2022.47 789.47,2022.47 869.47,2022.47 949.47,2022.47 1029.47,2022.47 1109.47,2022.47 1189.47,2022.47 1269.47,2022.47 2069.47,2022.47 189.47,2102.47 269.47,2102.47 349.47,2102.47 429.47,2102.47 509.47,2102.47 589.47,2102.47 669.47,2102.47 909.47,2102.47 989.47,2102.47 1069.47,2102.47 1149.47,2102.47 1229.47,2102.47 1309.47,2102.47 1389.47,2102.47 1549.47,2102.47 1629.47,2102.47 1709.47,2102.47 1949.47,2102.47 229.47,2182.47 309.47,2182.47 389.47,2182.47 469.47,2182.47 549.47,2182.47 629.47,2182.47 709.47,2182.47 949.47,2182.47 1029.47,2182.47 1109.47,2182.47 1189.47,2182.47 1269.47,2182.47 1349.47,2182.47 1589.47,2182.47 1669.47,2182.47 1749.47,2182.47 349.47,2262.47 429.47,2262.47 509.47,2262.47 589.47,2262.47 669.47,2262.47 749.47,2262.47 829.47,2262.47 909.47,2262.47 989.47,2262.47 1069.47,2262.47 1149.47,2262.47 1229.47,2262.47 1309.47,2262.47 1389.47,2262.47 1709.47,2262.47 469.47,2342.47 549.47,2342.47 629.47,2342.47 709.47,2342.47 789.47,2342.47 869.47,2342.47 949.47,2342.47 1269.47,2342.47 1349.47,2342.47 1509.47,2342.47 589.47,2422.47 669.47,2422.47 749.47,2422.47 829.47,2422.47 909.47,2422.47 1229.47,2422.47 1549.47,2422.47 789.47,2502.47 869.47,2502.47 949.47,2502.47 1269.47,2502.47
  other v2: 1502,675 482,765 248,895 1482,899 1304,936 1366,958 1065,970 1496,999 2075,1027 2038.66,1046 2014,1051 1495,1053 354,1068 236,1085 966,1110 1500,1115 295,1129 2269,1166 1601.47,1216 565,1255 2155,1258 661.47,1297 1676,1300 515,1346 991,1439 673.47,1446 788,1492 1675,1500 2191,1506 2121,1550 1005,1572 2169,1599 1382,1629 1002,1633 925,1690 2260,1728 2105,1734 989,1740 1931,1744 1332,1800 2058,1828 1808,1833 1313,1864 1938,1913 2005,1930 2145,1943 1852,1971 1943,2006 1767,2038.47 1522,2071 1379,2072 1702,2074.47 1855,2092 1264,2144 1361,2144 1781,2166 1395,2180 1716,2211 1655,2251 1558,2290 1379,2293 1228,2320 1469,2330.47 1333,2382 1479,2384
  other v3: 785.47,1341
I2S1/PDM_IN3_AEC: J3.17 P16.1 R2.1 | length 858.7
  Top Layer w8: P16.1@1110,1317.5 1223.5,1317.5 1248.72,1292.28 J3.17 1463.28,1292 1487,1292 1506,1311 1506,1648 1550,1692 R2.1
I2S1/PDM_SCLK: J3.23 P10.1 | length 460.4
  Top Layer w8: P10.1 1110.5,1576.5 1217.6,1576.5 1247,1547.1 1247,1513 1349.61,1410.39 J3.23
I2S1_LRCLK: J3.22 P11.1 | length 322.4
  Top Layer w8: P11.1 1343.3,1390.7 J3.22
I2S1_MCLK: J3.25 P9.1 | length 334.6
  Top Layer w8: P9.1 1372,1449 1462.24,1449 J3.25
I2S1_SDO: J3.21 P12.1 R2.2 | length 866.9
  Top Layer w8: P12.1 1111.5,1489.5 1221.5,1489.5 1339.98,1371.02 J3.21 1485.02,1371.02 1491,1377 1491,1655 1566,1730 R2.2 ; P12.1@1109,1497 P12.1@1109,1503.5
IR_RX: J3.29 P6.1 | length 517
  Top Layer w8: P6.1 1149.9,1720 1180.4,1750.5 1226.5,1750.5 1282.11,1694.89 1282.11,1613.89 1367.5,1528.5 J3.29
"MUTE_  MIC": J3.13 P20.1 | length 372.4
  Top Layer w8: P20.1@1125,1144 1129.5,1139.5 1317.5,1139.5 1392.85,1214.85 1463,1214.85 J3.13
MUTE_MIC: R4.1 S1.2 | length 565.9
  Top Layer w8: R4.1 1626,1884 1924,1884 2033.24,1774.76 2078.13,1774.76 S1.2
NetC1_1: C1.1 J1.1 R1.1 | length 231.3
  Top Layer w20: v2(703,817) C1.1 R1.1
  Bottom Layer w20: J1.1 v2(703,817)
NetC5_1: C5.1 Y1.3 | length 120
  Top Layer w8: C5.1 908,1460 950,1502 Y1.3
NetC5_2: C5.2 R100.2 U2.6 | length 150.8
  Top Layer w8: C5.2 R100.2 878,1366 896.85,1347.15 U2.6
NetC6_1: C6.1 Y1.1 | length 185.6
  Top Layer w8: C6.1 840,1595.8 Y1.1
NetC6_2: C6.2 R100.1 U2.7 | length 155.9
  Top Layer w10: C6.2 R100.1 871.25,1348.75 U2.7
NetC7_1: C7.1 C8.1 L1.2 U2.1 U2.5 U2.10 | length 584
  Top Layer w8: L1.2 C8.1 C7.1@1027,1376
  Top Layer w10: U2.10 794.45,1225 808.18,1211.27 922.45,1211.27 ; U2.5 922.45,1211.27 ; C7.1 1024.85,1371.85 U2.1 1024.85,1228 1008.13,1211.27 922.45,1211.27
NetC9_1: C9.1 J10.1 R13.1 | length 183.4
  Top Layer w20: R13.1 C9.1 J10.1
NetC12_1: C12.1 R19.1 R20.2 U2.13 | length 472.1
  Top Layer w8: v2@717.65,1053.35 U2.13
  Top Layer w12: R19.1 R20.2 C12.1 554,1052 v2(577,1052)
  Bottom Layer w8: v2(577,1052) v2@717,1052
  other v2: 718,1053
NetC13_1: C13.1 J6.1 R21.1 | length 160.5
  Top Layer w20: J6.1 C13.1 R21.1
NetC14_1: C14.1 J7.1 R22.1 | length 169.7
  Top Layer w20: J7.1@351.5,1394.5 C14.1 520.5,1394.5 R22.1
NetD1_1: D1.1 R5.1 | length 76.6
  Top Layer w8: R5.1 2043,1638 2059,1622 D1.1
NetD2_1: D2.1 R6.1 | length 49
  Top Layer w8: R6.1 D2.1
NetD3_1: D3.1 J2.A7 J2.B7 R9.2 | length 387.4
  Top Layer w8: R9.2 1917.5,1026.5 1917.5,1046 D3.1 1913.75,1110.75 1913.75,1147.38 1934.3,1167.92 2045.31,1167.92 2047.16,1169.77 J2.A7 2091.23,1169.77 2101.08,1159.92 J2.B7
NetD4_1: D4.1 J2.A6 J2.B6 R8.2 | length 357.8
  Top Layer w8: R8.2 1933.5,1026.5 1933.5,1054.5 D4.1 1929.75,1111.75 1929.75,1140.75 1940.92,1151.92 2045.31,1151.92 2047.16,1150.08 J2.A6 2089.71,1150.08 2099.55,1140.24 J2.B6
NetD5_2: D5.2 R17.1 | length 165.5
  Top Layer w8: R17.1 948.02,771 1012.7,771 1024.7,783 D5.2
NetR8_1: R8.1 U1.15 | length 760.9
  Top Layer w8: U1.15 1927.65,1268.05 1932.44,1272.84 1947,1272.84 1961,1258.84 1961,1224.63 1949.37,1213 1843.37,1213 1771,1140.63 1771,955.37 1811.87,914.5 1904,914.5 1910.63,914.5 1933.5,937.37 1933.5,961.5 R8.1
NetR9_1: R9.1 U1.16 | length 734.4
  Top Layer w8: U1.16 1927.65,1293.64 1932.44,1288.84 1953.63,1288.84 1977,1265.47 1977,1218 1956,1197 1850,1197 1787,1134 1787,962 1818.5,930.5 1904,930.5 1917.5,944 1917.5,961.5 R9.1
NetR14_1: R14.1 U2.4 | length 109.9
  Top Layer w8: R14.1 917,1360 948.05,1328.95 U2.4
NetR15_2: R15.2 U2.21 | length 191.7
  Top Layer w8: U2.21 845.65,906.35 870.5,881.5 919.52,881.5 R15.2
NetR16_2: R16.2 R17.2 U2.18 | length 215.3
  Top Layer w8: U2.18 768.85,922.15 796,895 820.02,895 R16.2 R17.2
NetR18_2: R18.2 U2.17 | length 158.9
  Top Layer w8: U2.17 743.25,918.75 782,880 793.02,880 R18.2
POWER_KEY: J3.16 P17.1 S4.2 | length 1459.4
  Top Layer w8: v2(1493,2250) 1581,2250 1636,2305 S4.2
  Top Layer w10: P17.1@1196,1275 1198.41,1272.59 J3.16 1491.59,1272.59 v2@1492,1272.18
  Bottom Layer w10: v2(1492,1271) 1492,2249 v2(1493,2250)
RECOVER: J3.12 S5.2 | length 1272.8
  Top Layer w8: S5.2 1396,2345 v2(1397,2344) ; v2(1427,1193.85) J3.12
  Bottom Layer w8: v2(1397,2344) 1428,2313 1428,1194.85 v2(1427,1193.85)
RESET: J3.11 S6.2 | length 1281
  Top Layer w8: J3.11@1463.83,1175 J3.11 1504.17,1174.17 1521,1191 1521,1637 1551,1667 2053,1667 2169,1551 S6.2
RXD: J5.3 R7.2 U1.5 | length 1275.8
  Top Layer w8: U1.5 1637.36,1498.36 1647,1508 1647,1527.54 1661,1541.54 1693,1541.54 1709,1525.54 1709,1272 v2(1697,1260) 1711,1246 1711,1219 1703,1211 R7.2
  Bottom Layer w8: v2(1697,1260) 1707,1250 1707,642.69 1752.32,597.36 J5.3
SARADC_IN1: J3.30 P5.1 | length 422.7
  Top Layer w8: P5.1 1222,1793 1297.11,1717.89 1297.11,1620.11 1369.03,1548.18 J3.30
SPI_CLK_M2: J3.33 P2.1 | length 604.7
  Top Layer w8: P2.1 1143.5,1921.5 1220.99,1921.5 1255,1887.49 1255,1844.21 1347,1752.21 1347,1633.85 1373.85,1607 1462.76,1607 J3.33
SPI_CSN0_M2: J3.34 P1.1 | length 559.9
  Top Layer w8: P1.1 1355,1964 1395,1924 1395,1646.92 1415,1626.92 J3.34
SPI_RX_M2: J3.32 P3.1 | length 456.2
  Top Layer w8: P3.1 1332,1746 1332,1627.64 1372.09,1587.55 J3.32 J3.32@1461.45,1586
SPI_TX_M2: J3.31 P4.1 | length 554.6
  Top Layer w8: P4.1 1137.5,1835.5 1216.6,1835.5 1314.21,1737.89 1314.21,1624.21 1370.56,1567.87 J3.31
SPK_EN: R3.1 R4.2 | length 42
  Top Layer w8: R4.2 R3.1
TXD: J5.1 R10.2 U1.1 | length 1288.9
  Top Layer w8: U1.1 1638.28,1600.72 1650,1589 1650,1569.54 1662,1557.54 1699.63,1557.54 1725,1532.17 1725,1276 v2(1741,1260) 1727.31,1246.31 ; 1727,1244 1727,1246 1727.31,1246.31 ; R10.2 1727.31,1220.69 1727.31,1246.31
  Bottom Layer w8: 1731,1256 1723,1248 1723,649.31 1763.64,608.68 J5.1
UART_RX_AO_A: J3.28 P7.1 | length 384.9
  Top Layer w8: P7.1 1227,1708 1263,1672 1263,1608.21 1362.4,1508.81 J3.28
UART_RX_AO_B: J3.10 R10.1 | length 313.9
  Top Layer w8: J3.10 1482.75,1154.48 1484.59,1152.64 1662.36,1152.64 1681,1134 1728,1134 1741,1147 R10.1
UART_TX_AO_A: J3.27 P8.1 | length 466.6
  Top Layer w8: P8.1 1140,1642 1161.5,1663.5 1221.5,1663.5 1248,1637 1248,1602 1360.87,1489.13 J3.27
UART_TX_AO_B: J3.9 R7.1 | length 294.7
  Top Layer w8: J3.9 1482.75,1134.8 1484.59,1136.64 1635,1136.64 1643.64,1128 1643.64,1127.64 v2(1642,1126) ; v2(1642,1174) 1694,1174 R7.1
  Bottom Layer w8: v2(1642,1126) v2(1642,1174)
USB20_HOST_DM: J3.7 R31.1 U2.25 | length 732.5
  Top Layer w8: U2.25 948.05,1019 952.85,1023.8 952.85,1054.48 990.11,1091.74 1441.79,1091.74 1442.7,1092.65 1460.22,1092.65 J3.7 1482.75,1095.43 1484.59,1093.58 1561.58,1093.58 R31.1
USB20_HOST_DP: J3.6 R32.1 U2.26 | length 704.9
  Top Layer w8: U2.26 973.65,1019 968.85,1023.8 968.85,1047.85 996.74,1075.74 J3.6 1482.75,1075.74 1484.59,1077.58 1560.42,1077.58 R32.1
VBUS_UART: C3.1 C4.1 J2.A4 J2.A9 J2.B4 J2.B9 R11.1 R12.2 U1.20 | length 1535.2
  Top Layer w8: U1.20 1949,1396 1959,1386 C3.1 1985.48,1425.98 C4.1 ; J2.A4 2091.29,1110.71 2101.13,1100.87 J2.B4 2150.87,1100.87 2163.04,1113.04 2163.04,1187.96 2151.71,1199.29 J2.B9 2099,1199.29 2089.15,1209.14 J2.A9
  Top Layer w10: R11.1 v2(1687,1776) ; v2(1801,1396) U1.20 ; v2(2030,1209) 2030.14,1209.14 J2.A9
  Top Layer w20: R11.1 R12.2
  Bottom Layer w10: v2(1687,1776) 1762,1776 1801,1737 v2(1801,1396) 1801,1238 1830,1209 v2(2030,1209)
VCC3V3: C2.1 R5.2 R6.2 U1.4 U1.17 U1.19 | length 1251.7
  Top Layer w8: U1.4 1544.05,1523.95 1538,1530 1538,1621 1555,1638 v2(1950,1638) R5.2 ; U1.19 1834.41,1370.41 1823,1359 1823,1332 1835.77,1319.23 U1.17 v2@1952,1319.23 ; v2@1954.71,1319.23 C2.1 ; v2(1978,1483) R6.2
  Bottom Layer w8: v2(1950,1638) 1950,1511 v2(1978,1483) 1954.82,1459.82 1954.82,1322.82 v2(1952,1320)
VOL+: J3.15 P18.1 S2.2 | length 1769
  Top Layer w8: P18.1@1120,1232 1350,1232 v2@1362,1244 ; v2(1359,1244) v2@1362,1244 ; v2(1359,2010) 1909.3,2010 1934.3,1985 1951.7,1985 1951.78,1985.08 S2.2@1997,1985.08 ; J3.15 1370.91,1252.91 v2@1362,1244
  Bottom Layer w8: v2(1359,1244) v2(1359,2010)
VOL-: J3.14 P19.1 S3.2 | length 1528.5
  Top Layer w8: P19.1 1337,1182 1388.22,1233.22 J3.14 1499.78,1233.22 v2(1500,1233) 1503.56,1233 v2@1503.78,1233.22 ; v2(1521,2033) 1723,2033 1731,2041 S3.2
  Bottom Layer w8: v2(1500,1233) 1521,1254 v2(1521,2033)
pads on no net: J2.31 J2.32 J2.A2 J2.A3 J2.A5 J2.A8 J2.A10 J2.A11 J2.B2 J2.B3 J2.B5 J2.B8 J2.B10 J2.B11 J3.3 J3.4 S1.6 S2.6 S3.6 S4.6 S5.6 S6.6 U1.2 U1.3 U1.6 U1.8 U1.9 U1.10 U1.11 U1.12 U1.13 U1.14 U1.24 U1.27 U1.28 U2.14 U2.19 U2.20 U2.22 U2.23

## Polygon pours and split planes (outlines as drawn)
no net on Keep-Out Layer "AutoNaming" (none, remove dead copper): -196.26,1279.66 ccw(c1083.16,1279.66) 1083.16,0.25 ccw(c1083.16,1279.66) 2362.57,1279.66 ccw(c1083.16,1279.66) 1083.16,2559.08 ccw(c1083.16,1279.66)
GND on Bottom Layer "AutoNaming" (hatched 90Degree grid 4 track 5, remove dead copper, pour order 2): -281,2587 -256,2562 2432,2562 2432,18 2490,-40 2483,-47 -271,-47 -271,2575 -278,2582
GND on Top Layer "AutoNaming" (hatched 90Degree grid 4 track 5, remove dead copper, pour order 4): -338,2622 -322,2638 2477,2638 2477,-145 2429,-193 2405,-217 -271,-217 -271,2579 -326,2634

## Keep-outs
Keep-Out Layer:
  circle w0.5: c1083.14,3918.42 r1279.42
  circle w0.5: c3721.88,1279.64 r1279.42
  circle w0: c3722.2,3918.3 r1279.42
  circle w0.5: c1083.16,1279.66 r1279.42
  lines w0.5: -176.85,3359.97 ccw(c1083.23,3918.36) 661.51,2606.2 661.5,2591.81 ccw(c1083.22,1279.63) -155.11,1884.79 -176.85,1834.88 -176.85,3359.96 ; -99.8,4625.71 -176.85,4625.71 -176.85,5394.79 cw(c-118.11,5394.79) -118.11,5453.53 4923.19,5453.53 cw(c4923.19,5394.79) 4981.93,5394.79 4981.93,4625.71 4905,4625.71 4904.49,4626.56 ccw(c3722.18,3918.29) 4642.11,4944.56 4641.52,4945.08 4641.52,5211.59 4198.76,5211.59 ccw(c3721.94,3918.43) 2410.14,4341.27 ; -99.74,572.4 -176.85,572.4 -176.85,-196.69 ccw(c-118.11,-196.69) -118.11,-255.43 4923.19,-255.43 ccw(c4923.19,-196.69) 4981.93,-196.69 4981.93,572.4 4905.4,572.4 4904.89,571.54 cw(c3722.15,1279.38) 2410.09,856.97 2409.7,858.19 2395.37,858.19 2394.98,856.98 cw(c1083.17,1279.7) -99.23,571.54 ; -99.29,4626.56 cw(c1083.16,3918.45) 163.22,4944.76 ; 163.81,4945.28 163.81,5211.59 606.32,5211.59 cw(c1083.13,3918.43) 2394.93,4341.27 ; 963.43,5172.25 cw(c963.73,5168.76) 963.47,5172.25 ; 1202.84,5172.25 ccw(c1202.51,5168.76) 1202.8,5172.25 ; 1503.98,2606.03 ccw(c1083.13,3918.46) 2395.47,3497.32 ; 1504,2606.01 1504,2592.07 cw(c1083.13,1279.64) 2395.43,1700.95 ; 1968.99,5294.5 1969.02,5294.5 ; 2395.43,1700.98 2405.24,1700.98 ; 2409.6,3497.32 ccw(c3721.99,3918.38) 3300.27,2606.2 ; 3300.24,2606.21 3300.23,2591.83 ccw(c3721.95,1279.64) 2409.64,1700.98 ; 2405.24,1700.98 2409.64,1700.98 ; 2405.24,1700.98 2409.64,1700.98 ; 2006.6,5294.5 2006.62,5294.5 ; 4142.74,2592.08 cw(c3721.87,1279.65) 4981.93,1838.11 4981.93,3359.98 cw(c3721.89,3918.44) 4142.74,2606.02 4142.74,2592.08
  lines w0.51: 26.85,4799.23 cw(c21.83,4724.47) 96,4735.01 ; 117,4904.99 ccw(c191.17,4915.53) 186.15,4840.77 ; 187.7,2873.38 ccw(c218.9,2908.79) 251.91,2942.53 ; 224.75,204.43 ccw(c210.36,282.18) 288.97,273.58 ; 265.67,2388.65 cw(c213.44,2296.7) 318.68,2307.06 ; 302.53,2786.98 cw(c332.47,2823.47) 360.47,2861.47 ; 340.03,118.42 cw(c418.64,109.82) 404.25,187.57 ; 380.32,2461.94 ccw(c468.9,2461.84) 430.5,2382.01 ; 1740.04,180.21 cw(c1721.18,110.6) 1792.22,98.12 ; 1814.53,4973.53 ccw(c1798.81,5045.53) 1872.47,5048.02 ; 1814.7,2331.38 ccw(c1783.7,2424.55) 1878.91,2400.53 ; 1855.32,253.94 ccw(c1937.74,249.97) 1905.5,174.01 ; 1869.18,2912.86 cw(c1817.38,2814.47) 1926.14,2837.62 ; 1926.53,4886.98 cw(c2000.19,4889.47) 1984.47,4961.47 ; 1929.53,2244.98 cw(c1998.19,2251.36) 1987.47,2319.48 ; 1982.35,3001.42 ccw(c2042.41,2983.42) 2032.53,2921.5 ; 2821.27,2322.58 cw(c2783.28,2234.65) 2878.22,2247.34 ; 2835.5,4968.36 cw(c2817.49,4895.56) 2892.46,4893.12 ; 2841.7,2858.38 ccw(c2821.76,2941.28) 2905.91,2927.53 ; 2849.47,214.47 ccw(c2827.75,291.15) 2907.41,288.97 ; 2934.43,2411.14 ccw(c2987.31,2388.63) 2984.62,2331.22 ; 2948.43,5058.14 ccw(c3008.55,5040.17) 2998.62,4978.22 ; 2956.53,2771.98 cw(c3025.64,2778.01) 3014.47,2846.47 ; 2958.03,133.42 cw(c3031.51,129.58) 3022.25,202.57 ; 4415.02,206.65 cw(c4391.4,141.53) 4458.04,122.65 ; 4454.47,2327.47 ccw(c4423.12,2411.64) 4512.41,2401.97 ; 4528.32,280.94 ccw(c4597.97,268.95) 4578.5,201.01 ; 4554.45,2944.55 cw(c4560.37,2886.29) 4617.74,2874.56 ; 4563.03,2246.42 cw(c4638.93,2240.34) 4627.24,2315.57 ; 4628.55,4828.2 ccw(c4625.72,4901.69) 4698.55,4891.5 ; 4649,3039.48 ccw(c4702.92,3025.35) 4712.55,2970.45 ; 4721.39,4729.52 cw(c4797.06,4707.73) 4796.64,4786.48

## Other copper
Top Layer:
  rectangle net 3V3: 1447,1719.35 1479,1755
  rectangle net 5V: 1445,1640 1479,1710
  rectangle net GND: 2051,1037 2105,1047
  pour cut-out: -6050.53,-3977.53
  pour cut-out: 1266,539 1297,570 1335,570 1335,590 1274,651 1256,651 1256,567 1243,554
  pour cut-out: 322,1303 322,1233 331,1224 348,1241 382,1241 382,1263 385.5,1266.5 347,1305 325,1305
  pour cut-out: 1255.47,1979.5 1278,1956.97 1278,1480 1274,1476 1267.53,1482.47 1059.25,1482.47 1059.25,1977.28 1061.47,1979.5
  pour cut-out: 1352,1186 1352,1074 1348,1078 1063,1078 1063,1414.02 1085.98,1437 1177,1437
  pour cut-out: 1530.34,1523.6 1530.34,1457.6 1534.5,1458.47 1544.1,1462.07 1549,1493
  pour cut-out: 643,1318 722.73,1318 748.05,1343.32 746.37,1345 669,1345 644,1320 644,1319
  pour cut-out: 1603,1140 cw(c1639.21,1103.79) 1639.21,1155 1693,1155 1693,1089.49 cw(c1672.51,1089.49) 1687,1075 ccw(c1665.27,1053.27) 1665.27,1084 1635,1084 ccw(c1613.27,1084) 1628.64,1099.36 1597,1131 1603.59,1137.59 ccw(c1600.17,1141) 1605,1141
Bottom Layer:
  pour cut-out: 1945,1521 1950,1516 1950,1460 1968,1478 1968,1499 1946,1521
  pour cut-out: 618,1897 660,1939 681,1939 681,1877.79 694.79,1864 704,1864 704,1813.63 705.81,1811.81 696.44,1802.44 673.47,1802.44 673.47,1832.53 620,1886 620,1900

## Silkscreen, mask and mechanical layers (free items; w line width, h text height)
Top Overlay:
  lines w7.87: 1043,883 1060,883 ; 1051,875 1051,892 ; 2089,1529 2106,1529 ; 2090,1582 2107,1582 ; 2097,1521 2097,1538 ; 2098,1574 2098,1591
  text "AIWAC_DEBUG-V1.1_20180919" at -112,1644 h30
  text "TXD" at 1807,617 h30 r45
Bottom Overlay:
  text "upgrade" at 1517.47,2464 h30 r165
  text "pwr" at 1677.47,2396 h30 r155
  text "vol-" at 1911,2235 h30 r145
  text "vol+" at 2115,2025 h30 r135
  text "mute" at 2234,1820 h30 r120
  text "rst" at 2326,1564 h30 r105
Mechanical 2:
  lines w0.5: -6050.28,-3977.28 10091.45,-3977.28
Mechanical 4:
  lines w0.5: 56.3,550.37 cw(c59.16,552.38) 56.27,550.4
Mechanical 5:
  lines w0.5: -60.19,751.29 ccw(c-57.01,752.76) -59.94,750.85 ; 55.95,550.85 ccw(c59.08,552.42) 56.23,550.39
Mechanical 6:
  lines w0.5: -60.18,751.35 ccw(c-57,752.81) -60.12,751.24 ; 56.2,550.51 ccw(c59.14,552.4) 56.29,550.37
Mechanical 7:
  lines w0.5: 13.94,614.01 ccw(c16.95,615.81) 13.98,613.95
Mechanical 8:
  lines w0.5: 84.76,511.87 85.62,510.75
Mechanical 9:
  lines w0.5: 56.3,550.37 cw(c59.15,552.39) 56.27,550.41
Mechanical 11:
  circle w0.5: c2063.15,714.66 r126
  circle w0.5: c1083.15,2409.66 r126
  circle w0.5: c108.15,714.66 r126
Mechanical 12:
  circle w0.5: c2063.15,714.66 r126
  circle w0.5: c1083.15,2409.66 r126
  circle w0.5: c108.15,714.66 r126
Mechanical 13:
  circle w0.5: c2063.15,714.66 r126
  circle w0.5: c1083.15,2409.66 r126
  circle w0.5: c108.15,714.66 r126
Mechanical 14:
  circle w0.5: c2063.15,714.66 r126
  circle w0.5: c1083.15,2409.66 r126
  circle w0.5: c108.15,714.66 r126
Mechanical 15:
  circle w0.5: c2063.15,714.66 r126
  circle w0.5: c1083.15,2409.66 r126
  circle w0.5: c108.15,714.66 r126
Mechanical 16:
  circle w0.5: c2063.15,714.66 r126
  circle w0.5: c1083.15,2409.66 r126
  circle w0.5: c108.15,714.66 r126

## Dimensions
4981.93,4625.71 to -176.85,4625.71 on Top Layer
4912,-255 to 4923.19,5453.53 on Top Layer